# EAGLE board mikroAmpMeterV140_AnalogFrontend (EAGLE 6.3)
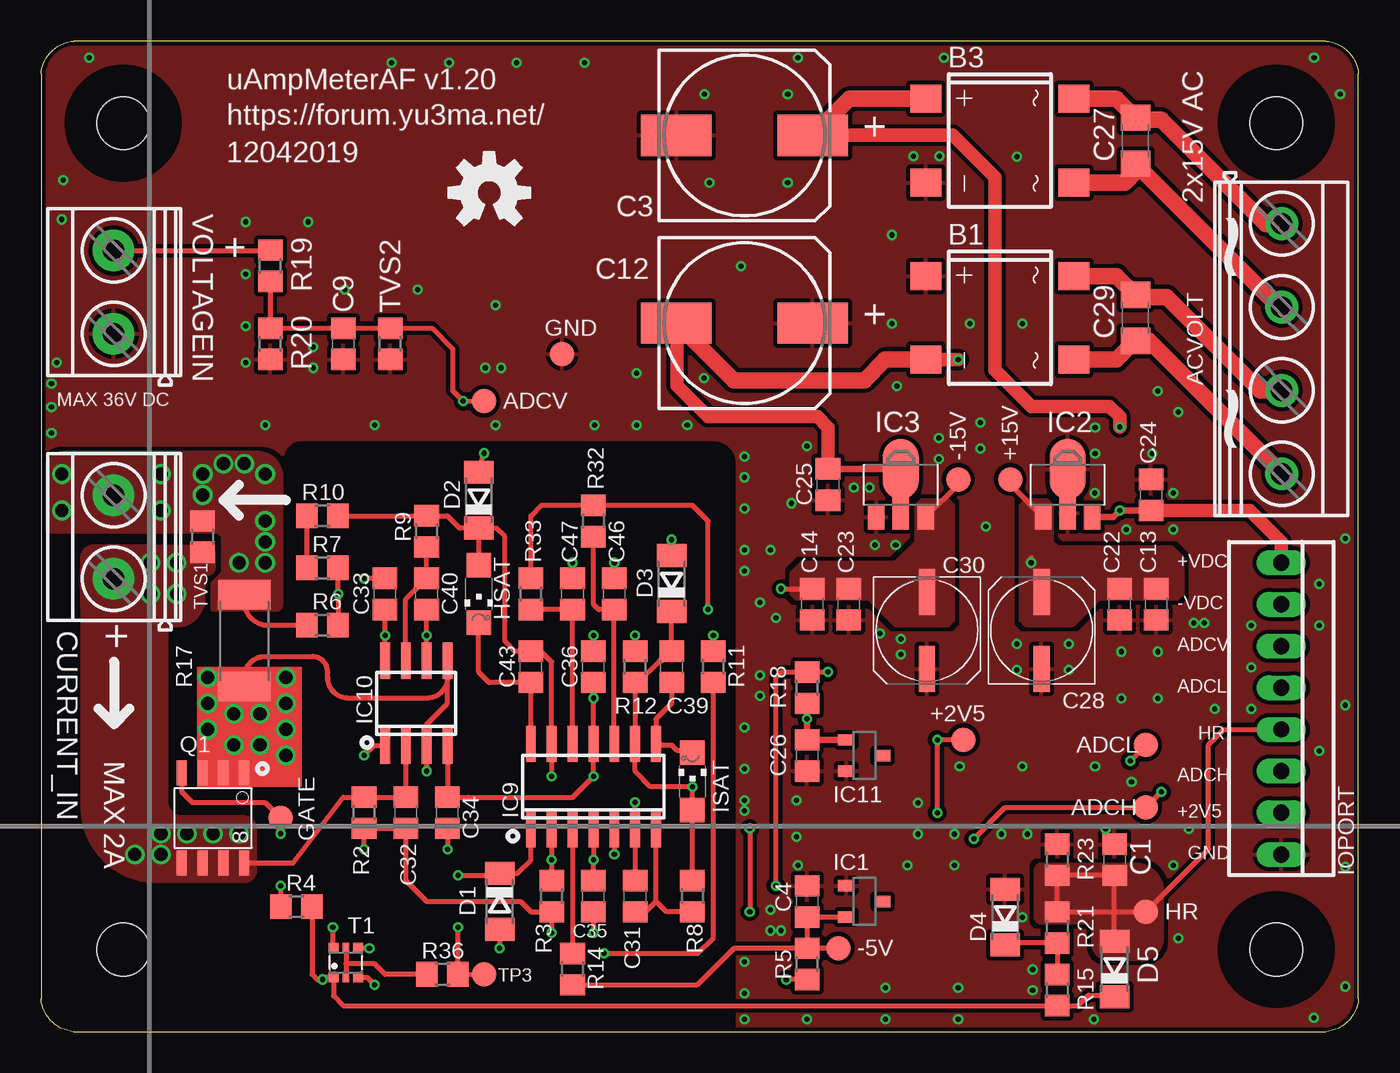
[diagram p0: board, top side]
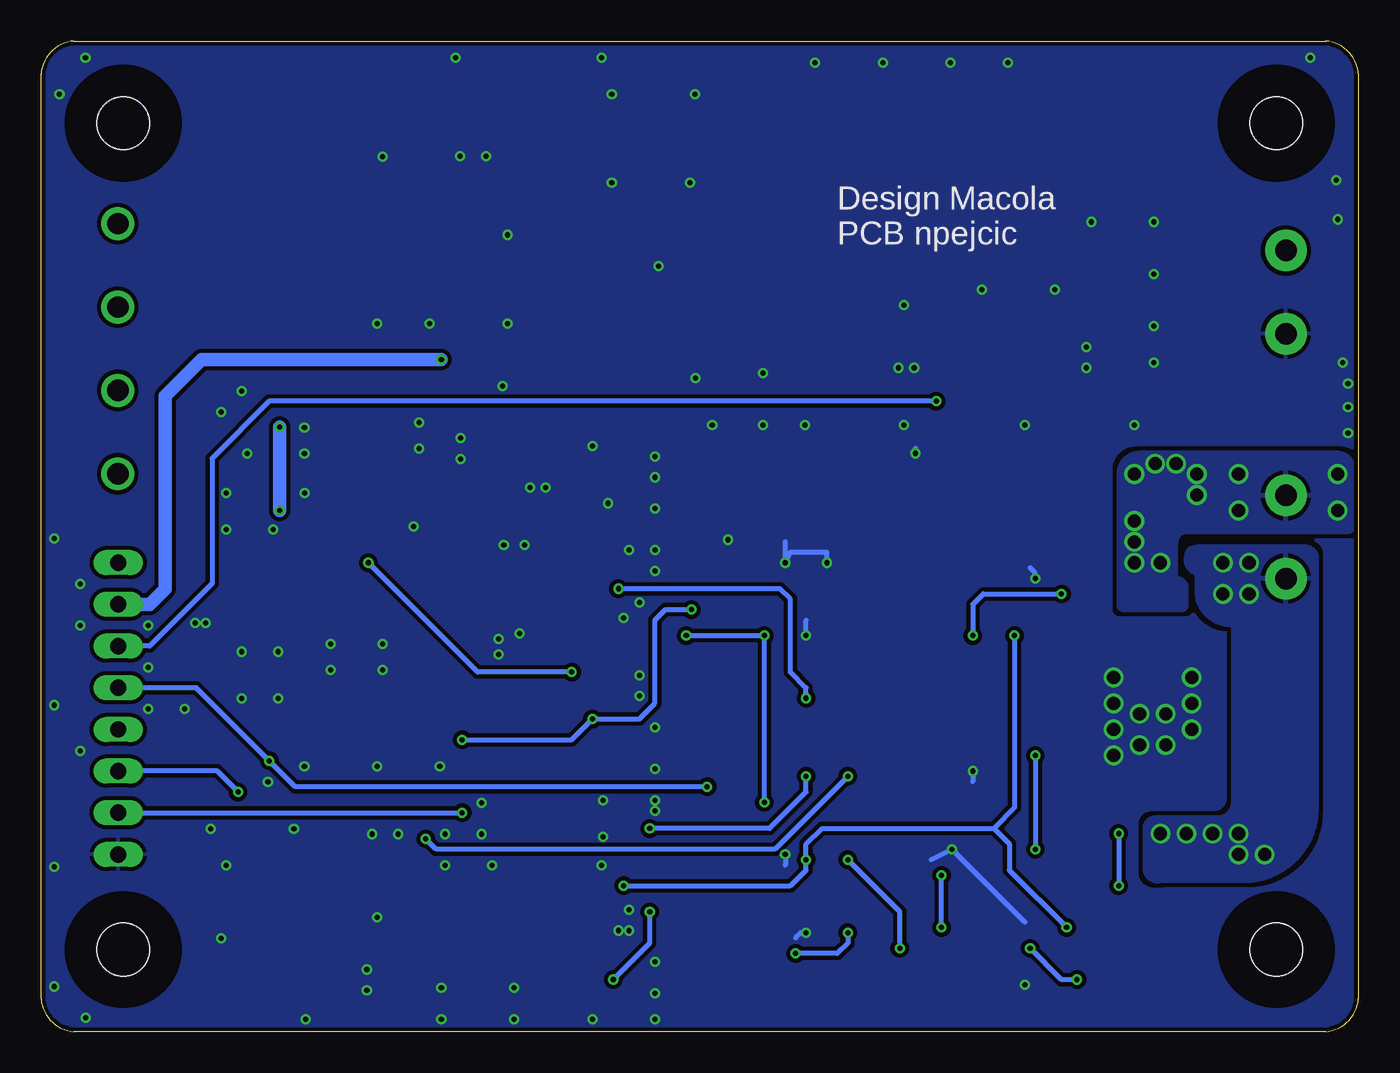
[diagram p1: board, bottom side, seen from below]

Size 80.27 x 60.36 mm. Coordinates in mm from the lower left corner, seen from the top.
Outline: 2,0 78.27,0 arc81 80.27,2 80.27,58.36 arc81 78.27,60.36 2,60.36 arc81 0,58.36 0,2 arc81 2,0
Copper layers (1*16): Top 0.035mm / dielectric 1.5mm / Bottom 0.035mm
Design rules "ITEADstudio_DRC": minimum track width 6mil, minimum drill 12mil, track to track 6mil, track to pad 6mil, pad to pad 6mil, via to via 6mil, smd to smd 0mil, copper to edge 10mil, drill to drill 10mil, minimum pad ring 10mil, minimum via ring 6mil, stop-mask expansion 2mil, vias tented up to drill 100mil, thermal gap 10mil
Holes 3.2 mm at 5,5 75.27,55.36 5,55.36 75.27,5
tRestrict: area 2,2 to 8,8; area 72.3,52.4 to 78.3,58.4; area 2,52.4 to 8,58.4; area 72.3,2 to 78.3,8; area 8.3,-0.3 to 41.9,35.6
bRestrict: area 2,2 to 8,8; area 72.3,52.4 to 78.3,58.4; area 2,52.4 to 8,58.4; area 72.3,2 to 78.3,8

## Footprints (pad centres in the part's own frame; a part is rotated, then mirrored left to right if it is on the bottom)
TP15R = smd 1.5 x 1.5: TP 0,0
MKDSN1,5/4-5,08 = drill 1.3 pad 2: 1 -7.641,0.025; 2 -2.561,0.025; 3 2.519,0.025; 4 7.599,0.025
DBS = smd 1.7 x 1.9: + -2.55,-4.5; - 2.55,-4.5; AC1 -2.55,4.5; AC2 2.55,4.5
C0805 = smd 1.3 x 1.5: 1 -0.95,0; 2 0.95,0
153CLV-1014 = smd 4.3 x 2.5: + 4.15,0; - -4.15,0
C1206 = smd 1.6 x 1.8: 1 -1.4,0; 2 1.4,0
UD-6,3X7,7_NICHICON = smd 2.8 x 1: + 2.35,0; - -2.35,0
MKDSN1,5/2-5,08 = drill 1.3 pad 2.54: 1 -2.561,0.025; 2 2.519,0.025
SOD80C = smd 1.4 x 1.8: A 1.7,0; C -1.7,0
CHIPLED_1206 = smd 1.5 x 1.5: A 0,-1.75; C 0,1.75
DBZ_R-PDSO-G3 = smd 0.7 x 1: 1 -0.95,-1.1; 2 0.95,-1.1; 3 0,1.1
SOT89 = smd 1 x 1.5: 1 -1.499,-1.981; 3 1.499,-1.981 | smd 1 x 2: 2 0,-1.727 | smd 2.2 x 3.7: 2@1 0,0.94
SO14 = smd 0.6 x 2.2: 1 -3.81,-2.6; 2 -2.54,-2.6; 3 -1.27,-2.6; 4 0,-2.6; 5 1.27,-2.6; 6 2.54,-2.6; 7 3.81,-2.6; 8 3.81,2.6; 9 2.54,2.6; 10 1.27,2.6; 11 0,2.6; 12 -1.27,2.6; 13 -2.54,2.6; 14 -3.81,2.6
SO08@1 = smd 0.6 x 2.2: 1 -1.905,-2.6; 2 -0.635,-2.6; 3 0.635,-2.6; 4 1.905,-2.6; 5 1.905,2.6; 6 0.635,2.6; 7 -0.635,2.6; 8 -1.905,2.6
22-23-2081 = drill 1 long: 1 -8.89,0; 2 -6.35,0; 3 -3.81,0; 4 -1.27,0; 5 1.27,0; 6 3.81,0; 7 6.35,0; 8 8.89,0
SO-8 = smd 1.524 x 0.61: 1 -2.743,1.905; 2 -2.743,0.635; 3 -2.743,-0.635; 4 -2.743,-1.905; 5 2.743,-1.905; 6 2.743,-0.635; 7 2.743,0.635; 8 2.743,1.905
R0805 = smd 1.3 x 1.5: 1 -0.95,0; 2 0.95,0
R2512 = smd 1.8 x 3.2: 1 -2.8,0; 2 2.8,0
SOT363 = smd 0.6 x 0.6: 1 -0.75,-0.9; 3 0.75,-0.9; 4 0.75,0.9; 6 -0.75,0.9 | smd 0.4 x 0.6: 2 0,-0.9; 5 0,0.9

## Placement (x,y rotation side)
+2V5  PTR1TP15R  [TP15R]  56.2,17.78 0 top
+15V  PTR1TP15R  [TP15R]  59.05,33.66 0 top
-5V  PTR1TP15R  [TP15R]  48.58,5.08 0 top
-15V  PTR1TP15R  [TP15R]  55.88,33.66 0 top
ACVOLT  MKDSN1,5/4-5,08  [MKDSN1,5/4-5,08]  75.56,41.59 270 top
ADCH  PTR1TP15R  [TP15R]  67.31,13.65 0 top
ADCL  PTR1TP15R  [TP15R]  67.31,17.46 0 top
ADCV  PTR1TP15R  [TP15R]  26.99,38.42 0 top
B1  DB104S  [DBS]  58.42,43.5 270 top
B3  DB104S  [DBS]  58.42,54.29 270 top
C1  10p  [C0805]  65.41,10.48 90 top
C3  220uF/35V  [153CLV-1014]  42.86,54.61 0 top
C4  100nF  [C0805]  46.67,7.94 270 top
C9  100nF  [C0805]  18.41,41.91 90 top
C12  220uF/35V  [153CLV-1014]  42.86,43.18 0 top
C13  10n  [C0805]  67.94,26.04 270 top
C14  10n  [C0805]  46.99,26.04 90 top
C22  100n  [C0805]  65.72,26.04 270 top
C23  100n  [C0805]  49.21,26.04 90 top
C24  100nF  [C0805]  67.63,32.7 270 top
C25  100nF  [C0805]  47.94,33.34 270 top
C26  100nF  [C0805]  46.67,16.83 90 top
C27  10nF  [C1206]  66.67,54.29 90 top
C28  10u  [UD-6,3X7,7_NICHICON]  60.96,24.45 90 top
C29  10nF  [C1206]  66.67,43.5 90 top
C30  10u  [UD-6,3X7,7_NICHICON]  53.98,24.45 270 top
C31  100p  [C0805]  36.2,8.26 270 top
C32  10n  [C0805]  22.23,13.34 90 top
C33  100n  [C0805]  20.95,26.67 90 top
C34  100n  [C0805]  24.77,13.34 270 top
C35  100n  [C0805]  33.66,8.26 270 top
C36  100n  [C0805]  33.66,22.23 90 top
C39  33p  [C0805]  38.42,22.23 90 top
C40  10p  [C0805]  23.5,26.67 270 top
C43  33p  [C0805]  29.84,22.23 90 top
C46  10n  [C0805]  34.92,26.67 90 top
C47  10n  [C0805]  32.38,26.67 90 top
CURRENT_IN  MKDSN1,5/2-5,08  [MKDSN1,5/2-5,08]  4.45,30.16 90 top
D1  1N4148  [SOD80C]  27.94,7.94 270 top
D2  TMMBAT48FILM  [SOD80C]  26.67,32.38 90 top
D3  TMMBAT48FILM  [SOD80C]  38.42,27.3 90 top
D4  BZV55C4V7  [SOD80C]  58.74,6.99 90 top
D5  TMMBAT48FILM  [SOD80C]  65.41,3.81 90 top
GATE  PTR1TP15R  [TP15R]  14.61,13.02 0 top
GND  PTR1TP15R  [TP15R]  31.75,41.27 0 top
HR  PTR1TP15R  [TP15R]  67.31,7.3 0 top
HSAT  [CHIPLED_1206]  26.67,26.67 180 top
IC1  LM4040CYM3-5.0-TR  [DBZ_R-PDSO-G3]  50.16,7.94 270 top
IC2  L78L15ACUTR  [SOT89]  62.55,33.34 0 top
IC3  L79L15ACUTR  [SOT89]  52.39,33.34 0 top
IC9  OPA4187ID  [SO14]  33.66,14.92 0 top
IC10  OPA2187IDR  [SO08@1]  22.86,20 0 top
IC11  LM4040CYM3-2.5-TR  [DBZ_R-PDSO-G3]  50.16,16.83 270 top
IOPORT  22-23-2081  [22-23-2081]  75.56,19.68 270 top
ISAT  [CHIPLED_1206]  39.69,15.24 0 top
LOGO1  OSHW-LOGOM  [OSHW-LOGO-M]  27.3,51.12 0 top
Q1  IRF8736  [SO-8]  10.48,13.02 270 top
R2  1k0 0.1%  [R0805]  19.68,13.34 270 top
R3  4k7  [R0805]  31.11,8.26 270 top
R4  22R  [R0805]  15.56,7.62 0 top
R5  2k7  [R0805]  46.67,4.13 270 top
R6  1k0 0.1%  [R0805]  17.14,24.77 180 top
R7  62k 0.1%  [R0805]  17.14,28.26 180 top
R8  2k2  [R0805]  39.69,8.26 90 top
R9  2k2  [R0805]  23.5,30.48 90 top
R10  510R0  [R0805]  17.14,31.43 0 top
R11  20k 0.1%  [R0805]  40.96,22.23 90 top
R12  10k0 0.1%  [R0805]  36.2,22.23 270 top
R14  22k  [R0805]  32.38,3.81 270 top
R15  2k2  [R0805]  61.91,2.54 90 top
R17  CRA2512-FZ-R020ELF  [R2512]  12.38,23.81 270 top
R18  2k7  [R0805]  46.67,20.95 90 top
R19  62k 0.1%  [R0805]  13.97,46.67 90 top
R20  4k7 1%  [R0805]  13.97,41.91 90 top
R21  1k8  [R0805]  61.91,6.35 90 top
R23  4k7  [R0805]  61.91,10.48 270 top
R32  22k  [R0805]  33.66,31.11 270 top
R33  22k  [R0805]  29.84,26.67 270 top
R36  2k2  [R0805]  24.45,3.49 0 top
T1  MMDT2227  [SOT363]  18.57,4.21 0 top
TP3  PTR1TP15R  [TP15R]  26.99,3.49 0 top
TVS1  CG0603MLC-05E  [R0805]  9.84,30.16 270 top
TVS2  CG0603MLC-05E  [R0805]  21.27,41.91 90 top
VOLTAGEIN  MKDSN1,5/2-5,08  [MKDSN1,5/2-5,08]  4.45,45.09 90 top

## Library data of the parts
+2V5 +15V -5V -15V ADCH ADCL ADCV GATE GND HR TP3 = testpad
ACVOLT = con-phoenix-508; MPN: SMKDSN1,5/4-5,08; OC_FARNELL: 1792905; OC_NEWARK: 70R0300
B1 B3 = rectifier
C1 C3 C4 C9 C12-C14 C22-C36 C39 C40 C43 C46 C47 R2-R12 R14 R15 R17-R21 R23 R32 R33 R36 TVS1 TVS2 = rcl
CURRENT_IN VOLTAGEIN = con-phoenix-508; MPN: MKDSN 1,5/2-5.08; OC_FARNELL: 1792903; OC_NEWARK: 30M2397
D1-D5 = diode
HSAT ISAT = led
IC1 IC11 = texas; MPN: LM4041A12IDBZR; OC_FARNELL: 1407949; OC_NEWARK: 58K5875
IC2 IC3 IC9 IC10 = linear
IOPORT = con-molex; MF: MOLEX; MPN: 22-23-2081; OC_FARNELL: 1756826; OC_NEWARK: 01C7592
LOGO1 = SparkFun-Aesthetics
Q1 = transistor-fet
T1 = nxp_60

## Nets
+2V5: +2V5.TP C26.2 IC11.1 IOPORT.7 R18.1 R32.1 R33.1
+15V: +15V.TP C13.1 C22.1 C28.+ C33.1 C35.1 IC2.1 IC9.4 IC10.8 R18.2 T1.6
+VDC: B3.+ C3.+ C24.2 IC2.3 IOPORT.1
-5V: -5V.TP C4.2 IC1.2 R5.1 R14.2
-15V: -15V.TP C14.2 C23.2 C30.- C34.1 C36.1 IC3.3 IC9.11 IC10.4 R5.2
-VDC: B1.- C12.- C25.1 IC3.2 IC3.2@1 IOPORT.2
ADC_HIGH: ADCH.TP C43.2 D2.C HSAT.A IC9.13 IOPORT.6 R9.2 R10.2
ADC_LOW: ADCL.TP C39.2 D3.C IC9.9 IOPORT.4 ISAT.A R8.2 R12.2
ADC_VOLT: ADCV.TP C9.2 IOPORT.3 R19.1 R20.2 TVS2.2
CIN+: C32.2 CURRENT_IN.1 IC10.2 Q1.5 Q1.6 Q1.7 Q1.8 R2.1 TVS1.2
CIN-: CURRENT_IN.2 R6.2 R17.1 TVS1.1
GND: B1.+ B3.- C1.2 C3.- C4.1 C9.1 C12.+ C13.2 C14.1 C22.2 C23.1 C24.1 C25.2 C26.1 C28.- C30.+ C33.2 C34.2 C35.2 C36.2 C46.2 C47.2 D2.A D3.A D4.A GND.TP IC1.1 IC2.2 IC2.2@1 IC3.1 IC9.5 IC10.3 IC10.5 IC11.2 IOPORT.8 Q1.1 Q1.2 Q1.3 R17.2 R20.1 R23.1 T1.3 TVS2.1 VOLTAGEIN.1
HIGH_RANGE: C1.1 D5.A HR.TP IOPORT.5 R21.2 R23.2
N$1: IC9.3 R14.1
N$18: C32.1 IC10.1 R2.2 R3.2 R11.1
N$19: C31.1 IC9.6 R11.2 R12.1
N$21: C31.2 IC9.7 R8.1
N$26: ACVOLT.1 B3.AC1 C27.2
N$28: ACVOLT.2 B3.AC2 C27.1
N$29: ACVOLT.3 B1.AC1 C29.2
N$30: ACVOLT.4 B1.AC2 C29.1
N$39: GATE.TP Q1.4 R4.1
N$40: D5.C R4.2 R15.1 T1.1 T1.4
N$41: R36.1 T1.2 T1.5
N$42: D1.C IC9.1 R36.2 TP3.TP
N$43: D1.A IC9.2 R3.1
N$45: D4.C R15.2 R21.1
N$47: C39.1 IC9.8 ISAT.C
N$48: C40.2 IC10.6 R6.1 R7.1
N$49: R7.2 R10.1
N$50: C40.1 IC10.7 R9.1
N$53: C43.1 HSAT.C IC9.14
N$55: C47.1 IC9.12 R33.2
N$56: C46.1 IC9.10 R32.2
VOLT_INPUT: R19.2 VOLTAGEIN.2

## Tracks (layer width: path | path; a pad name or v marks a point on that pad's centre or on a via)
+2V5  (via drill 0.31)
  Top 0.305: R33.1 29.84,31.43 30.48,32.06 R32.1 39.69,32.07 40.64,31.11 v40.64,25.72 | R18.1 | v54.61,13.34 v54.61,17.78 +2V5.TP
  Top 0.406: R18.1 v46.67,19.05 C26.2 IC11.1
  Bottom 0.305: v40.64,25.72 42.23,25.72 42.86,25.08 42.86,20 43.81,19.05 v46.67,19.05 47.94,17.78 v54.61,17.78 | IOPORT.7 v54.61,13.34
+15V  (via drill 0.31)
  Top 0.305: C33.1 v20.95,24.13 20.95,23.81 IC10.8 | IC9.4 v33.66,10.48 C35.1 | v44.77,8.89 44.77,21.59 45.09,21.91 R18.2 v47.94,21.91 | v60.33,28.57 60.33,28.89 | +15V.TP 59.05,33.35 IC2.1 | v17.78,6.35 17.78,5.15 T1.6
  Bottom 0.305: 22.23,12.38 32.7,12.38 33.66,11.43 v33.66,10.48 33.66,9.84 34.61,8.89 v44.77,8.89 | 22.23,12.38 21.27,11.43 21.27,9.84 v17.78,6.35 | v47.94,21.91 53.66,21.91 v60.33,28.57 | v20.95,24.13 20.95,13.65 22.23,12.38
  pour Top (isolate 0.254, no thermals): 62.87,24.77 60.01,24.77 59.69,25.08 59.69,32.07 60.01,32.38 61.28,32.38 61.59,32.07 61.59,29.84 61.91,29.53 68.9,29.53 69.53,28.89 69.53,26.67 69.22,26.35 64.45,26.35
+VDC  (via drill 0.31)
  Top 0.406: IC2.3 65.33,31.36 v65.72,31.75 C24.2
  Top 0.813: C24.2 73.66,31.75 75.56,29.84 IOPORT.1 | v65.72,36.83 65.72,37.47 65.09,38.1 60.33,38.1 58.1,40.32 58.1,52.07 55.56,54.61 C3.+
  Top 1.016: B3.+ 49.24,56.84 C3.+
  Bottom 0.813: v65.72,31.75 v65.72,36.83
-5V
  Top 0.305: R14.2 40.01,2.86 42.22,5.08 R5.1 | R5.1 | R5.1 C4.2 IC1.2 | -5V.TP R5.1
-15V  (via drill 0.31)
  Top 0.305: IC10.4 C34.1 26.03,14.29 26.04,14.29 32.38,14.29 v33.66,15.56 IC9.11 v33.66,20.32 C36.1 | R5.2 v45.41,3.18 v45.4,3.17 | v45.09,26.99 46.35,26.99 C14.2 | v43.18,12.38 v43.18,7.3 | -15V.TP 55.88,33.35 IC3.3
  Bottom 0.305: v33.66,15.56 33.66,14.61 35.88,12.38 v43.18,12.38 | v33.66,20.32 33.66,20.95 34.61,21.91 34.61,26.35 35.24,26.99 v45.09,26.99 | v43.18,7.3 43.18,5.4 v45.4,3.17
  pour Top (isolate 0.254, no thermals): 45.72,26.67 45.72,27.94 46.35,28.57 52.07,28.57 53.34,29.84 53.34,32.07 53.66,32.38 55.24,32.38 55.56,32.07 55.56,25.08 55.24,24.77 52.07,24.77 50.48,26.35 46.04,26.35
-VDC  (via drill 0.31)
  Top 0.305: IC3.2@1 IC3.2
  Top 0.406: IC3.2@1 47.96,34.28 C25.1
  Top 0.813: 47.96,34.28 47.96,36.81 47.31,37.47 40.64,37.47 38.73,39.37 38.73,43.16 C12.- | v55.88,40.96 B1.-
  Top 1.016: B1.- 51.42,40.95 50.16,39.69 42.2,39.69 C12.-
  Bottom 0.813: v55.88,40.96 70.48,40.96 72.71,38.73 72.71,26.99 73.66,26.04 IOPORT.2
ADC_HIGH  (via drill 0.31)
  Top 0.305: v31.11,15.56 IC9.13 31.11,22.54 30.48,23.18 C43.2 28.89,23.18 28.26,23.81 28.26,30.16 27.73,30.68 D2.C | D2.C HSAT.A | D2.C 25.51,30.68 24.77,31.43 R9.2 R10.2 | v68.26,14.61 ADCH.TP 58.74,13.65 v56.83,11.75
  Bottom 0.305: v31.11,15.56 35.56,11.11 56.2,11.11 v56.83,11.75 | v68.26,14.61 69.53,15.88 IOPORT.6
ADC_LOW  (via drill 0.31)
  Top 0.305: ISAT.A 39.69,14.29 | ISAT.A v39.69,14.92 37.15,14.92 36.2,15.88 IC9.9 R12.2 36.36,21.27 37.7,22.62 37.86,22.62 C39.2 D3.C | R8.2 ISAT.A | ADCL.TP v66.36,16.51
  Bottom 0.305: v39.69,14.92 64.77,14.92 v66.36,16.51 70.8,20.95 IOPORT.4
ADC_VOLT  (via drill 0.31)
  Top 0.305: R19.1 R20.2 C9.2 TVS2.2 23.82,42.86 25.08,41.59 25.08,39.05 v25.72,38.42 ADCV.TP
  Bottom 0.305: v25.72,38.42 66.36,38.42 69.85,34.92 69.85,27.3 73.66,23.5 IOPORT.3
CIN+  (via drill 0.8)
  Top 0.305: Q1.8 15.35,10.27 18.41,14.29 R2.1 C32.2 IC10.2
  other vias: 7.3,10.79 5.71,10.79 8.89,12.06 10.48,12.06 12.06,12.06 7.3,12.06 6.67,28.57 8.26,28.57 6.67,26.67 8.26,26.67
  pour Bottom: 12.06,9.21 6.99,9.21 arc-90 2.54,13.65 2.54,28.82 arc-90 3.25,29.53 9.84,29.53 10.27,29.42 arc-45 10.48,28.92 10.48,28.89 arc-90 9.84,27.94 9.84,26.67 arc-90 7.62,24.82 7.62,13.97 arc90 8.57,13.02 12.38,13.02 arc-90 13.02,12.38 13.02,9.84 arc-90
  pour Top (no thermals): 2.54,26.04 2.54,28.89 arc-90 3.17,29.53 10.16,29.53 arc-90 10.48,29.21 10.48,28.26 arc-90 10.16,27.94 arc90 9.84,27.62 9.84,26.35 arc-90 8.26,24.77 3.81,24.77 arc-90
  pour Top (no thermals): 2.54,28.89 2.54,13.86 arc90 6.87,9.21 12.38,9.21 arc90 13.02,9.84 13.02,12.38 arc90 12.38,13.02 8.57,13.02 arc-90 7.62,13.97 7.62,28.26 arc90 6.35,29.53 3.17,29.53 arc90
CIN-  (via drill 0.8)
  Top 0.305: R6.2 13.6,24.77 arc-90 R17.1
  Top 1.27: TVS1.1
  Top 1.676: 12.32,26.67 R17.1
  other vias: 1.27,33.97 1.27,31.75 7.3,31.75 7.3,33.97 9.84,33.97 9.84,32.7 11.11,34.61 12.06,28.57 13.65,28.57 13.65,29.84 13.65,31.11 13.65,33.97 12.38,34.61
  pour Top (no thermals): 10.48,27.3 11.11,27.94 11.11,30.16 10.79,30.48 0.64,30.48 arc-90 0.32,30.8 0.32,34.1 arc-90 1.46,35.24 13.19,35.24 arc-90 14.61,33.82 14.61,26.04 arc-90 14.29,25.72 10.48,25.72
  pour Bottom: 0.32,30.8 0.32,34.29 arc-90 1.27,35.24 13.34,35.24 arc-90 14.61,33.97 14.61,26.04 arc-90 14.29,25.72 10.79,25.72 arc-90 10.48,26.04 10.48,26.99 arc-90 11.11,27.62 11.11,29.84 arc90 10.48,30.48 0.64,30.48 arc-90
GND  (via drill 0.31, 0.8)
  Top 0.305: R17.2 12.38,21.59 arc-90 13.65,22.86 16.51,22.86 arc-90 17.46,21.91 17.46,21.59 arc90 18.73,20.32 23.5,20.32 arc90 24.77,21.59 | IC10.5 24.77,21.59 | C35.2 v33.66,6.03 | IC9.5 v34.92,10.79 | 24.77,21.59 24.77,20 23.5,18.73 IC10.3 v23.5,15.88 | C33.2 v19.69,27.62 v19.68,27.62 | C36.2 v33.66,24.13 | C34.2 v24.77,11.11 | C46.2 v34.92,28.57 | C47.2 v32.38,28.57 | D2.A v26.99,35.24 | D3.A v38.42,29.97 | T1.3 19.87,3.31 v20.32,2.86 | Q1.3 Q1.2
  Top 1.676: Q1.2 Q1.1 R17.2
  Bottom 0.305: v33.66,6.03 33.97,6.03 34.29,5.71 | v34.92,10.79 34.92,10.16 | v23.5,15.88 23.5,15.24 | v19.68,27.62 19.68,27.94 20,28.26 | v33.66,24.13 33.66,25.08 | 26.04,10.48 v24.77,11.11 20.32,6.67 | 34.92,29.84 v34.92,28.57 34.61,29.21 32.38,29.21 v32.38,28.57 | v26.99,35.24 26.99,35.56
  other vias: 44.45,29.34 50.8,29.65 46.67,35.69 42.86,29.34 45.72,32.19 39.37,36.96 0.64,39.5 27.7,36.96 42.86,35.05 52.07,29.65 2.95,59.35 0.95,40.77 1.27,49.49 0.64,38.06 0.64,36.47 33.73,36.96 50.48,33.15 42.86,28.07 42.86,33.78 49.53,33.15 42.86,31.88 53.15,53.34 54.74,53.34 33.11,59.03 28.98,59.03 24.85,59.03 21.36,59.03 46.13,59.35 55.02,59.35 77.56,59.35 79.15,57.12 43.81,26.16 44.77,25.21 43.81,20.45 43.81,21.72 52.39,23.94 52.39,22.99 51.12,24.26 42.86,18.54 42.86,16 42.86,14.1 42.86,13.46 46.04,14.1 46.04,11.87 44.45,7.43 44.45,6.16 45.09,6.16 42.86,4.25 42.86,2.35 77.55,0.84 79.45,2.75 79.45,10.05 79.45,19.89 79.45,30.05 20.32,36.96 13.65,36.96 42.86,0.76 46.67,0.76 51.44,0.76 55.88,0.76 64.14,0.76 40.73,51.73 45.49,51.73 45.49,57.12 40.41,57.12 51.84,48.55 51.84,43.15 56.6,43.15 59.78,43.15 59.46,53.31 42.63,46.65 52.16,39.34 54.7,36.17 54.7,34.9 57.56,30.77 57.24,37.12 57.24,35.53 64.22,36.8 64.22,35.22 67.72,35.22 68.03,39.03 69.3,37.76 65.81,23.15 68.03,23.15 68.03,20.29 65.81,20.29 55.97,16.17 59.78,16.17 64.22,16.17 71.53,19.66 73.75,19.66 73.75,22.2 73.75,24.74 77.88,27.28 77.88,24.74 77.88,17.12 64.86,12.36 69.3,5.69 68.99,10.13 69.94,12.36 66.45,15.21 53.43,13.94 53.43,12.04 55.65,12.04 58.51,12.04 60.1,12.04 59.78,6.96 60.41,3.78 60.41,2.51 46.13,10.13 52.79,10.13 55.65,10.13 27.7,44.26 1.35,51.88 12.46,49.34 16.27,49.34 18.49,45.21 27.07,40.45 22.94,45.21 28.02,40.45 36.27,40.13 36.27,36.96 40.4,39.81 16.59,41.72 16.59,40.45 12.46,46.16 12.46,42.99 12.46,40.77 62.63,23.62 62.63,22.03 59.45,22.03 59.45,23.62 66.12,30.61 68.98,30.61 68.98,32.83 64.21,32.83 70.25,24.89 70.88,24.89 55.88,2.67 51.44,2.67 10.16,21.59 10.16,20 10.16,18.41 11.75,19.37 11.75,17.46 13.34,19.37 13.34,17.46 14.92,16.83 14.92,18.41 14.92,20 14.92,21.59
  pour Top (isolate 0.254, rank 2): -0.44,60.77 80.33,60.77 80.64,-0.32 59.37,-0.32 58.42,-0.25 -0.44,-0.25
  pour Bottom (isolate 0.254, rank 2): -0.44,60.77 -0.44,-0.25 57.47,-0.25 58.1,-0.32 80.64,-0.32 80.33,60.77
HIGH_RANGE
  Top 0.305: IOPORT.5 72.07,18.41 71.12,17.46 71.12,11.11 HR.TP 67.62,7.3 R21.2 R23.2 C1.1 D5.A
  pour Top (no thermals): 60.96,10.16 66.67,10.16 arc-90 68.26,8.57 68.26,5.71 arc-90 66.99,4.45 65.09,4.45 arc-90 64.14,5.4 64.14,6.35 arc90 63.82,6.67 60.96,6.67 arc-90 60.64,6.99 60.64,9.84 arc-90
N$1
  Top 0.305: IC9.3 R14.1
N$18  (via drill 0.31)
  Top 0.305: IC10.1 20.26,17.4 v19.68,16.83 | v19.68,11.11 R2.2 C32.1 22.23,9.21 23.5,7.94 29.21,7.94 29.84,7.3 R3.2 v31.11,6.03 | v34.29,4.76 40.01,4.76 40.96,5.71 R11.1
  Bottom 0.305: v19.68,16.83 v19.68,11.11 | v31.11,6.03 31.11,5.4 31.75,4.76 v34.29,4.76
N$19  (via drill 0.31)
  Top 0.305: C31.1 IC9.6 v36.2,13.97 | R12.1 v36.2,24.13 | R11.2 v40.96,24.13
  Bottom 0.305: v36.2,13.97 v36.2,24.13 v40.96,24.13
N$21
  Top 0.305: C31.2 36.83,7.3 37.47,7.94 | 37.47,7.94 IC9.7 | R8.1 38.1,7.3 37.47,7.94
N$26
  Top 1.016: B3.AC1 65.53,56.84 C27.2 66.81,55.56 68.26,55.56 74.61,49.21 75.57,49.21 ACVOLT.1
N$28
  Top 1.016: B3.AC2 66.03,51.74 66.67,52.39 C27.1 75.44,44.13 75.57,44.13 ACVOLT.2
N$29
  Top 1.016: B1.AC1 65.53,46.05 C29.2 66.81,44.77 68.58,44.77 74.3,39.05 75.57,39.05 ACVOLT.3
N$30
  Top 1.016: B1.AC2 65.53,40.95 C29.1 67.49,42.1 ACVOLT.4
N$39  (via drill 0.31)
  Top 0.305: Q1.4 8.57,14.61 9.21,13.97 13.65,13.97 GATE.TP v14.61,12.06 | v14.61,8.89 R4.1
  Bottom 0.305: v14.61,12.06 v14.61,8.89
N$40  (via drill 0.31)
  Top 0.305: R4.2 16.51,3.5 16.83,3.17 v17.14,3.17 17.28,3.31 T1.1 17.82,2.18 18.41,1.59 61.27,1.59 R15.1 63.19,1.59 63.82,2.22 65.29,2.22 D5.C | v20,5.08 19.35,5.08 T1.4
  Bottom 0.305: v17.14,3.17 18.1,3.17 v20,5.08
N$41
  Top 0.305: R36.1 20.95,3.49 20.32,4.13 18.57,4.13 | T1.5 18.57,4.13 | 18.57,4.13 T1.2
N$42  (via drill 0.31)
  Top 0.305: IC9.1 29.84,10.48 29,9.64 D1.C 27.83,9.53 v25.4,9.53 | v25.4,6.35 25.4,4.44 R36.2 TP3.TP
  Bottom 0.305: v25.4,6.35 v25.4,9.53
N$43  (via drill 0.31)
  Top 0.305: D1.A v27.94,5.08 | R3.1 v31.11,10.48 IC9.2
  Bottom 0.305: v27.94,5.08 27.94,7.3 v31.11,10.48
N$45
  Top 0.305: R15.2 R21.1 58.85,5.4 D4.C
N$47
  Top 0.305: C39.1 38.42,20 37.47,19.05 IC9.8 37.72,17.52 37.78,17.46 38.42,17.46 38.73,17.14 39.53,17.14 ISAT.C
N$48  (via drill 0.31)
  Top 0.305: IC10.6 v23.5,24.13 C40.2 | R7.1 v18.09,26.67 R6.1
  Bottom 0.305: v23.5,24.13 23.5,26.04 22.86,26.67 v18.09,26.67
N$49
  Top 0.305: R10.1 R7.2
N$50
  Top 0.305: R9.1 C40.1 22.23,26.35 IC10.7
N$53
  Top 0.305: IC9.14 C43.1 27.3,21.27 26.67,21.91 HSAT.C
N$55
  Top 0.305: IC9.12 C47.1 R33.2
N$56
  Top 0.305: IC9.10 C46.1 33.97,25.72 33.66,26.04 R32.2
VOLT_INPUT
  Top 0.305: VOLTAGEIN.2 13.95,47.6 R19.2
(copper drawn outside any net)
  shapes: Top area x1

## Text on the board
tPlace: + | 2x15V AC | + | ~ | + | MAX 36V DC | ~ | +VDC | -VDC | + | ADCV | ADCL | HR | MAX 2A | ADCH | +2V5 | GND
bPlace: Design Macola / PCB npejcic
tNames: uAmpMeterAF v1.20 | https://forum.yu3ma.net/ | 12042019